# Altium PCB nrf24l01_cell(P40).PcbDoc (part 10 of 11)
Units mm, origin at the board's own origin, x right, y up, seen from the top; angles counter-clockwise.
Board outline 136.2 x 112.2 mm, 2 copper layers (TopLayer, BottomLayer); 520 components, 0 nets, 2804 pads, 1040 vias.
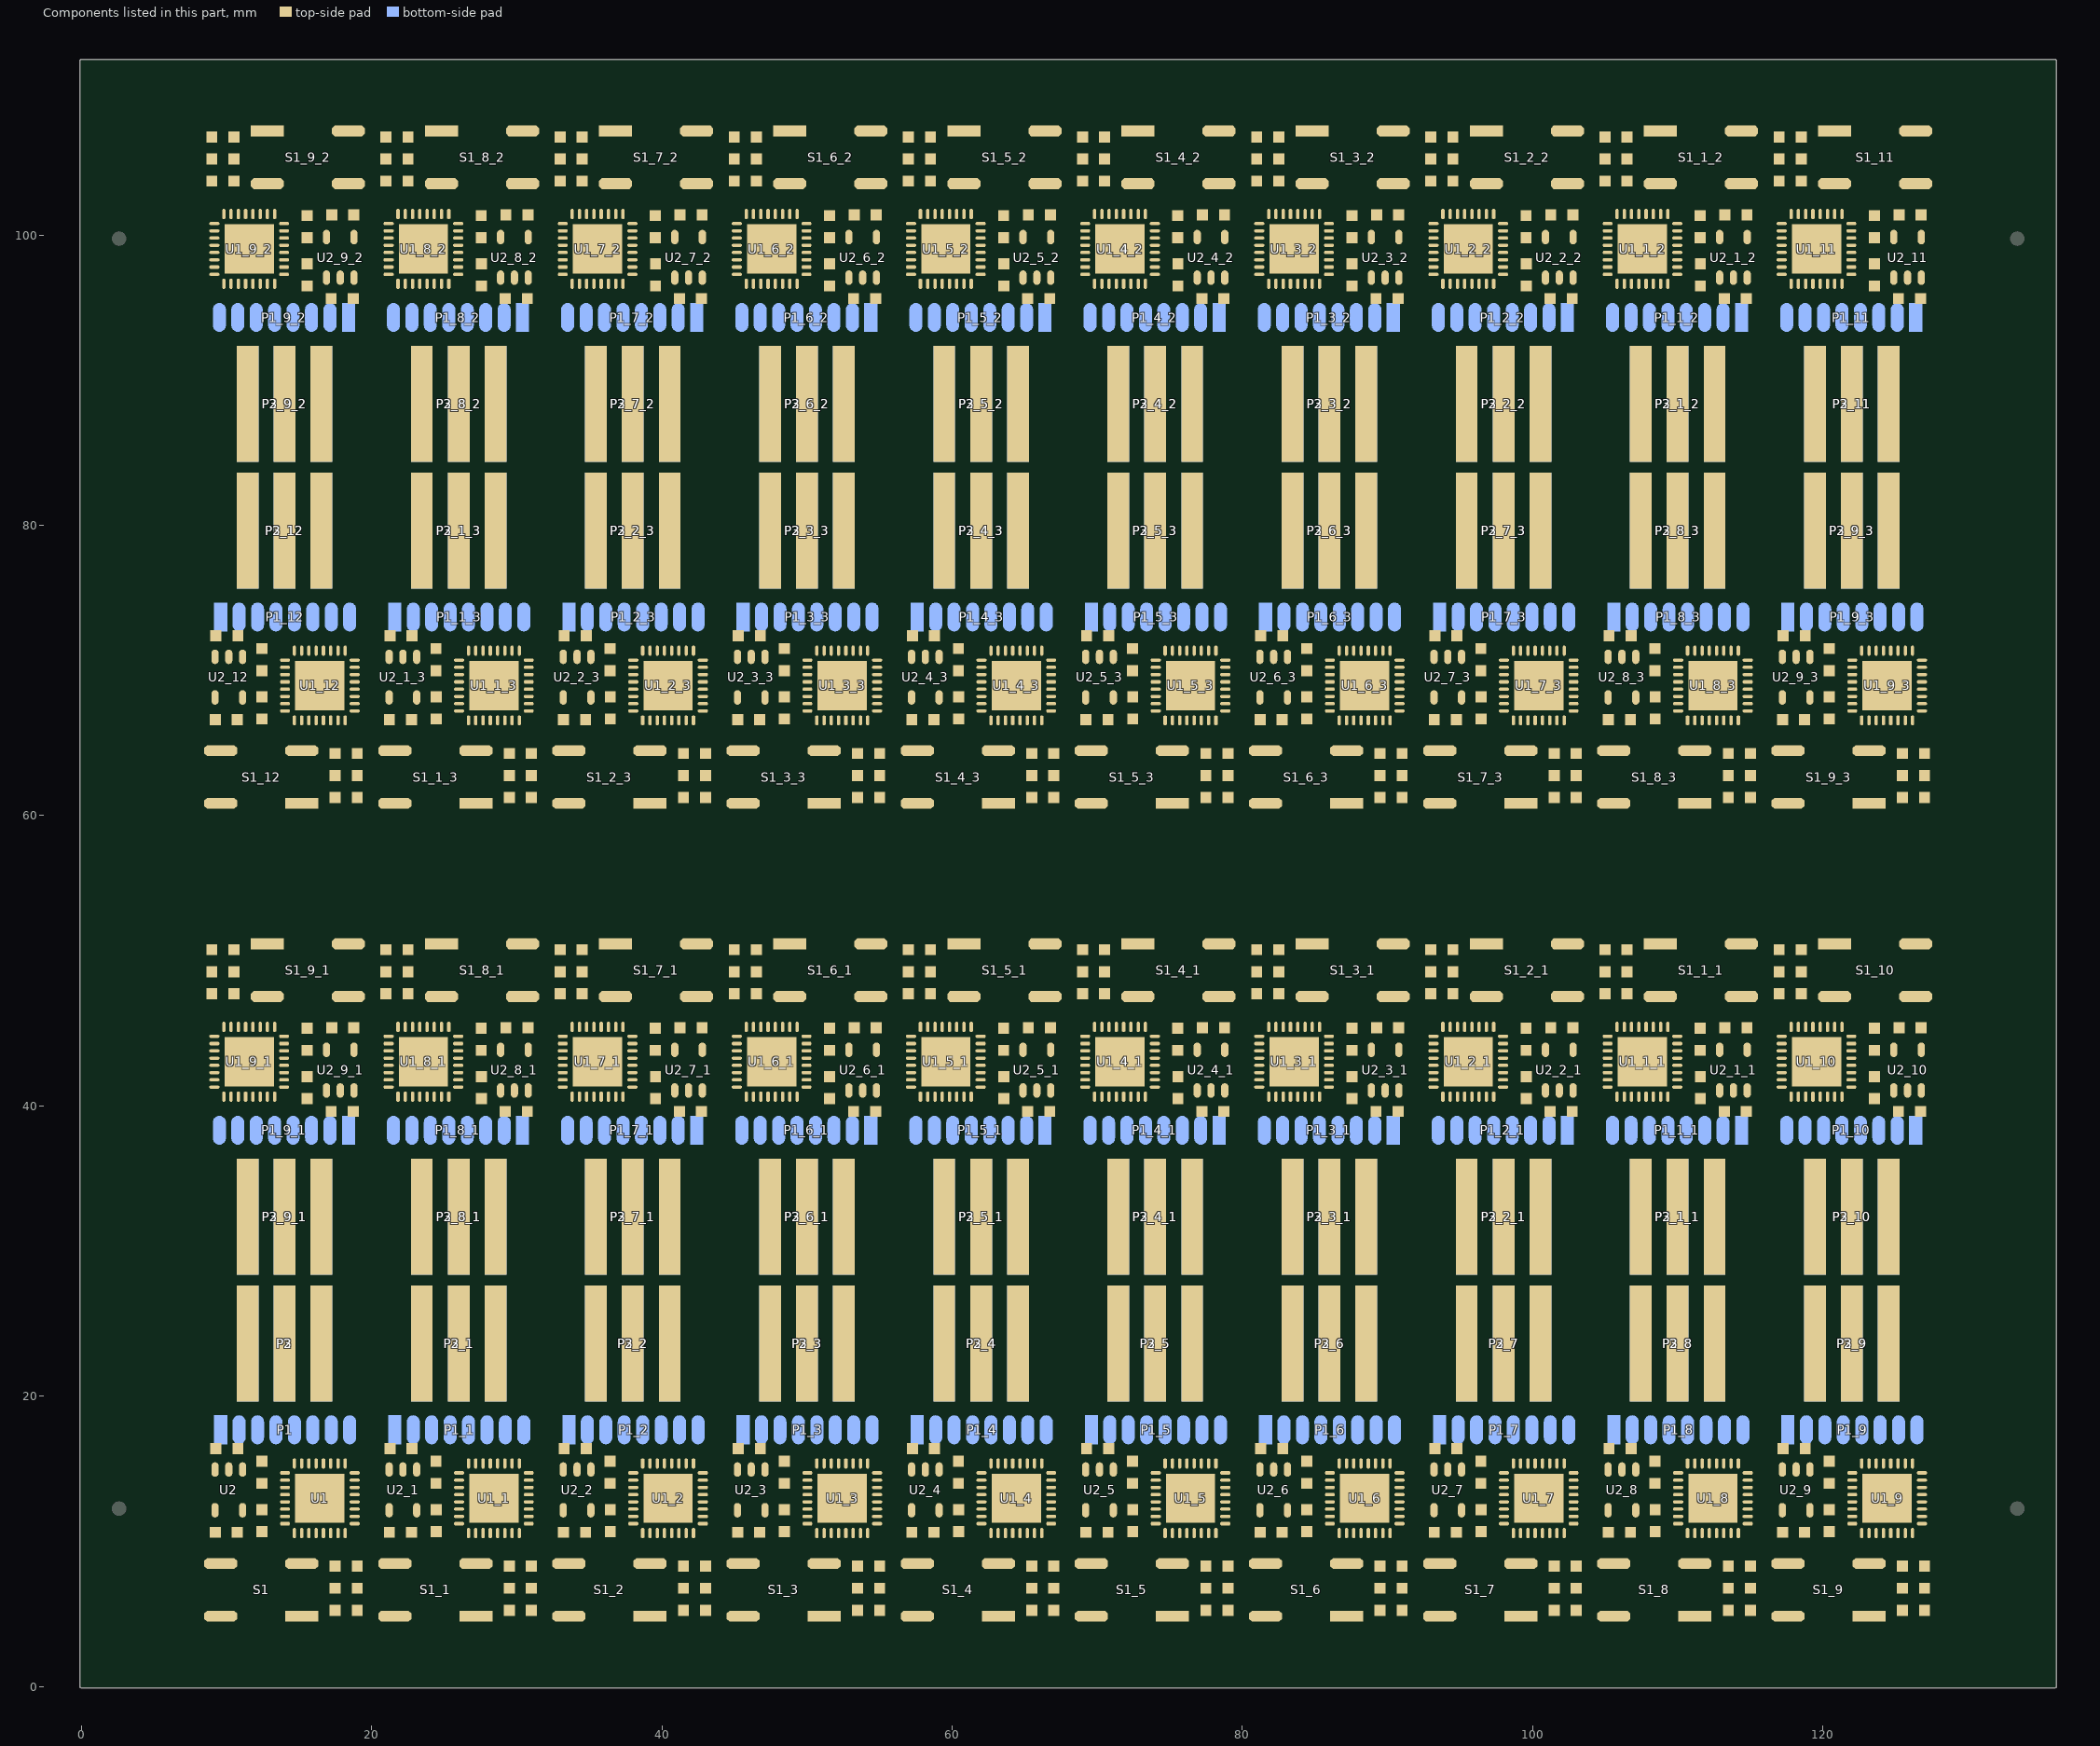
[diagram p10: the components of this part, seen from the top]

## Via types
v1: diameter 0.4, hole 0.2, TopLayer to BottomLayer, tented both sides, 1040 vias

## Nets (pads, with @x,y where several pads share a name; then routed paths per layer and width w, separated by ;. In a path a pad name is that pad's centre, name@x,y a point inside that pad or via, vN(x,y) a via of type N, cw(c..) or ccw(c..) an arc to the next point about the centre after c; other vN are vias at no path point) (continued)
copper on no net: (continued)
  BottomLayer w0.203: v1(102.99,9.79) 99.97,9.79 v1(97.27,12.49) 97.25,12.51 97.25,13.38 ; v1(102.99,65.79) 99.97,65.79 v1(97.27,68.49) 97.25,68.51 97.25,69.38 ; v1@103.24,38.14 ccw(c103.097,38.283) 103.3,38.283 ; v1@103.24,94.14 ccw(c103.097,94.283) 103.3,94.283 ; 103.3,38.332 ccw(c103.572,38.332) v1@103.38,38.14 ; 103.3,94.332 ccw(c103.572,94.332) v1@103.38,94.14 ; v1@103.38,12.28 ccw(c103.212,12.448) 103.45,12.448 ccw(c103.688,12.448) v1@103.52,12.28 ; v1@103.38,17.85 cw(c103.212,17.682) 103.45,17.682 cw(c103.688,17.682) v1@103.52,17.85 ; v1@103.38,68.28 ccw(c103.212,68.448) 103.45,68.448 ccw(c103.688,68.448) v1@103.52,68.28 ; v1@103.38,73.85 cw(c103.212,73.682) 103.45,73.682 cw(c103.688,73.682) v1@103.52,73.85 ; v1(103.45,12.21) v1(103.45,17.92) ; v1(103.45,68.21) v1(103.45,73.92) ; v1@104.48,38.15 ccw(c104.312,38.318) 104.55,38.318 ccw(c104.788,38.318) v1@104.62,38.15 ; v1@104.48,43.72 cw(c104.312,43.552) 104.55,43.552 cw(c104.788,43.552) v1@104.62,43.72 ; v1@104.48,94.15 ccw(c104.312,94.318) 104.55,94.318 ccw(c104.788,94.318) v1@104.62,94.15 ; v1@104.48,99.72 cw(c104.312,99.552) 104.55,99.552 cw(c104.788,99.552) v1@104.62,99.72 ; v1(104.55,38.08) v1(104.55,43.79) ; v1(104.55,94.08) v1(104.55,99.79) ; v1@104.62,17.86 cw(c104.428,17.668) 104.7,17.668 ; v1@104.62,73.86 cw(c104.428,73.668) 104.7,73.668 ; 104.7,17.717 cw(c104.903,17.717) v1@104.76,17.86 ; 104.7,73.717 cw(c104.903,73.717) v1@104.76,73.86 ; v1@104.75,17.93 104.7,17.88 104.7,14.05 105.776,12.974 107.776,12.974 v1(110.03,10.72) ; v1@104.75,73.93 104.7,73.88 104.7,70.05 105.776,68.974 107.776,68.974 v1(110.03,66.72) ; v1(105.01,46.21) 108.03,46.21 v1(110.73,43.51) 110.75,43.49 110.75,42.62 ; v1(105.01,102.21) 108.03,102.21 v1(110.73,99.51) 110.75,99.49 110.75,98.62 ; v1@105.08,46.14 cw(c105.248,45.972) 105.248,46.21 cw(c105.248,46.448) v1@105.08,46.28 ; v1@105.08,102.14 cw(c105.248,101.972) 105.248,102.21 cw(c105.248,102.448) v1@105.08,102.28 ; 105.6,17.68 105.36,17.44 105.36,13.97 105.95,13.38 109.25,13.38 ; 105.6,73.68 105.36,73.44 105.36,69.97 105.95,69.38 109.25,69.38 ; 107.105,19.838 cw(c106.674,19.18) v1@107.46,19.18 ; 107.105,75.838 cw(c106.674,75.18) v1@107.46,75.18 ; 107.216,20.008 cw(c106.92,19.556) 107.46,19.556 cw(c108,19.556) 107.704,20.008 ; 107.216,76.008 cw(c106.92,75.556) 107.46,75.556 cw(c108,75.556) 107.704,76.008 ; v1@107.39,19.21 ccw(c107.222,19.378) 107.46,19.378 ccw(c107.698,19.378) v1@107.53,19.21 ; v1@107.39,75.21 ccw(c107.222,75.378) 107.46,75.378 ccw(c107.698,75.378) v1@107.53,75.21 ; 107.46,23.63 v1@107.46,19.18 ; 107.46,79.63 v1@107.46,75.18 ; 107.815,19.838 ccw(c108.246,19.18) v1@107.46,19.18 ; 107.815,75.838 ccw(c108.246,75.18) v1@107.46,75.18 ; v1@108.79,19.468 ccw(c108.79,19.706) 108.958,19.538 ccw(c109.126,19.37) v1@108.888,19.37 ; v1@108.79,75.468 ccw(c108.79,75.706) 108.958,75.538 ccw(c109.126,75.37) v1@108.888,75.37 ; 109.035,19.615 ccw(c108.269,20.38) 109.352,20.38 ; 109.035,75.615 ccw(c108.269,76.38) 109.352,76.38 ; 109.076,19.656 cw(c109.787,18.944) 109.935,19.94 ; 109.076,75.656 cw(c109.787,74.944) 109.935,75.94 ; v1@109.18,13.87 cw(c109.012,13.702) 109.25,13.702 cw(c109.488,13.702) v1@109.32,13.87 ; v1@109.18,69.87 cw(c109.012,69.702) 109.25,69.702 cw(c109.488,69.702) v1@109.32,69.87 ; 109.25,12.776 ccw(c109.556,12.776) v1@109.34,12.56 ; v1(109.25,13.94) 109.25,13.38 ; 109.25,68.776 ccw(c109.556,68.776) v1@109.34,68.56 ; v1(109.25,69.94) 109.25,69.38 ; v1@109.27,12.392 cw(c109.27,12.154) 109.438,12.322 cw(c109.606,12.49) v1@109.368,12.49 ; v1@109.27,68.392 cw(c109.27,68.154) 109.438,68.322 cw(c109.606,68.49) v1@109.368,68.49 ; 109.361,19.941 cw(c109.861,19.441) 109.965,20.141 ; 109.361,75.941 cw(c109.861,75.441) 109.965,76.141 ; 109.905,19.739 ccw(c109.714,18.446) v1(108.79,19.37) 110,20.58 110,23.63 ; 109.905,75.739 ccw(c109.714,74.446) v1(108.79,75.37) 110,76.58 110,79.63 ; v1@109.932,10.72 ccw(c109.694,10.72) 109.862,10.888 ccw(c110.03,11.056) v1@110.03,10.818 ; v1@109.932,66.72 ccw(c109.694,66.72) 109.862,66.888 ccw(c110.03,67.056) v1@110.03,66.818 ; v1@109.97,45.182 cw(c109.97,44.944) 110.138,45.112 cw(c110.306,45.28) v1@110.068,45.28 ; v1(109.97,45.28) 112.224,43.026 114.224,43.026 115.3,41.95 115.3,38.12 v1@115.25,38.07 ; v1@109.97,101.182 cw(c109.97,100.944) 110.138,101.112 cw(c110.306,101.28) v1@110.068,101.28 ; v1(109.97,101.28) 112.224,99.026 114.224,99.026 115.3,97.95 115.3,94.12 v1@115.25,94.07 ; 110,32.37 110,35.42 v1(111.21,36.63) cw(c110.286,37.554) 110.095,36.261 ; 110,88.37 110,91.42 v1(111.21,92.63) cw(c110.286,93.554) 110.095,92.261 ; 110.035,35.859 ccw(c110.139,36.559) 110.639,36.059 ; 110.035,91.859 ccw(c110.139,92.559) 110.639,92.059 ; 110.065,36.06 ccw(c110.213,37.056) 110.924,36.344 ; 110.065,92.06 ccw(c110.213,93.056) 110.924,92.344 ; v1@110.632,43.51 ccw(c110.394,43.51) 110.562,43.678 ccw(c110.73,43.846) v1@110.73,43.608 ; v1@110.632,99.51 ccw(c110.394,99.51) 110.562,99.678 ccw(c110.73,99.846) v1@110.73,99.608 ; 110.648,35.62 cw(c111.731,35.62) 110.965,36.385 ; 110.648,91.62 cw(c111.731,91.62) 110.965,92.385 ; v1@110.66,43.44 cw(c110.444,43.224) 110.75,43.224 ; v1@110.66,99.44 cw(c110.444,99.224) 110.75,99.224 ; v1@110.68,42.13 ccw(c110.512,42.298) 110.75,42.298 ccw(c110.988,42.298) v1@110.82,42.13 ; v1@110.68,98.13 ccw(c110.512,98.298) 110.75,98.298 ccw(c110.988,98.298) v1@110.82,98.13 ; v1(110.75,42.06) 110.75,42.62 ; v1(110.75,98.06) 110.75,98.62 ; v1@111.112,36.63 cw(c110.874,36.63) 111.042,36.462 cw(c111.21,36.294) v1@111.21,36.532 ; v1@111.112,92.63 cw(c110.874,92.63) 111.042,92.462 cw(c111.21,92.294) v1@111.21,92.532 ; 112.185,36.162 ccw(c111.754,36.82) v1@112.54,36.82 ; 112.185,92.162 ccw(c111.754,92.82) v1@112.54,92.82 ; 112.296,35.992 ccw(c112,36.444) 112.54,36.444 ccw(c113.08,36.444) 112.784,35.992 ; 112.296,91.992 ccw(c112,92.444) 112.54,92.444 ccw(c113.08,92.444) 112.784,91.992 ; v1@112.47,36.79 cw(c112.302,36.622) 112.54,36.622 cw(c112.778,36.622) v1@112.61,36.79 ; v1@112.47,92.79 cw(c112.302,92.622) 112.54,92.622 cw(c112.778,92.622) v1@112.61,92.79 ; 112.54,32.37 v1@112.54,36.82 ; 112.54,88.37 v1@112.54,92.82 ; 112.895,36.162 cw(c113.326,36.82) v1@112.54,36.82 ; 112.895,92.162 cw(c113.326,92.82) v1@112.54,92.82 ; 114.4,38.32 114.64,38.56 114.64,42.03 114.05,42.62 110.75,42.62 ; 114.4,94.32 114.64,94.56 114.64,98.03 114.05,98.62 110.75,98.62 ; v1@114.92,9.72 ccw(c114.752,9.552) 114.752,9.79 ccw(c114.752,10.028) v1@114.92,9.86 ; v1@114.92,65.72 ccw(c114.752,65.552) 114.752,65.79 ccw(c114.752,66.028) v1@114.92,65.86 ; v1(114.99,9.79) 111.97,9.79 v1(109.27,12.49) 109.25,12.51 109.25,13.38 ; v1(114.99,65.79) 111.97,65.79 v1(109.27,68.49) 109.25,68.51 109.25,69.38 ; v1@115.24,38.14 ccw(c115.097,38.283) 115.3,38.283 ; v1@115.24,94.14 ccw(c115.097,94.283) 115.3,94.283 ; 115.3,38.332 ccw(c115.572,38.332) v1@115.38,38.14 ; 115.3,94.332 ccw(c115.572,94.332) v1@115.38,94.14 ; v1@115.38,12.28 ccw(c115.212,12.448) 115.45,12.448 ccw(c115.688,12.448) v1@115.52,12.28 ; v1@115.38,17.85 cw(c115.212,17.682) 115.45,17.682 cw(c115.688,17.682) v1@115.52,17.85 ; v1@115.38,68.28 ccw(c115.212,68.448) 115.45,68.448 ccw(c115.688,68.448) v1@115.52,68.28 ; v1@115.38,73.85 cw(c115.212,73.682) 115.45,73.682 cw(c115.688,73.682) v1@115.52,73.85 ; v1(115.45,12.21) v1(115.45,17.92) ; v1(115.45,68.21) v1(115.45,73.92) ; v1@116.48,38.15 ccw(c116.312,38.318) 116.55,38.318 ccw(c116.788,38.318) v1@116.62,38.15 ; v1@116.48,43.72 cw(c116.312,43.552) 116.55,43.552 cw(c116.788,43.552) v1@116.62,43.72 ; v1@116.48,94.15 ccw(c116.312,94.318) 116.55,94.318 ccw(c116.788,94.318) v1@116.62,94.15 ; v1@116.48,99.72 cw(c116.312,99.552) 116.55,99.552 cw(c116.788,99.552) v1@116.62,99.72 ; v1(116.55,38.08) v1(116.55,43.79) ; v1(116.55,94.08) v1(116.55,99.79) ; v1@116.62,17.86 cw(c116.428,17.668) 116.7,17.668 ; v1@116.62,73.86 cw(c116.428,73.668) 116.7,73.668 ; 116.7,17.717 cw(c116.903,17.717) v1@116.76,17.86 ; 116.7,73.717 cw(c116.903,73.717) v1@116.76,73.86 ; v1@116.75,17.93 116.7,17.88 116.7,14.05 117.776,12.974 119.776,12.974 v1(122.03,10.72) ; v1@116.75,73.93 116.7,73.88 116.7,70.05 117.776,68.974 119.776,68.974 v1(122.03,66.72) ; v1(117.01,46.21) 120.03,46.21 v1(122.73,43.51) 122.75,43.49 122.75,42.62 ; v1(117.01,102.21) 120.03,102.21 v1(122.73,99.51) 122.75,99.49 122.75,98.62 ; v1@117.08,46.14 cw(c117.248,45.972) 117.248,46.21 cw(c117.248,46.448) v1@117.08,46.28 ; v1@117.08,102.14 cw(c117.248,101.972) 117.248,102.21 cw(c117.248,102.448) v1@117.08,102.28 ; 117.6,17.68 117.36,17.44 117.36,13.97 117.95,13.38 121.25,13.38 ; 117.6,73.68 117.36,73.44 117.36,69.97 117.95,69.38 121.25,69.38 ; 119.105,19.838 cw(c118.674,19.18) v1@119.46,19.18 ; 119.105,75.838 cw(c118.674,75.18) v1@119.46,75.18 ; 119.216,20.008 cw(c118.92,19.556) 119.46,19.556 cw(c120,19.556) 119.704,20.008 ; 119.216,76.008 cw(c118.92,75.556) 119.46,75.556 cw(c120,75.556) 119.704,76.008 ; v1@119.39,19.21 ccw(c119.222,19.378) 119.46,19.378 ccw(c119.698,19.378) v1@119.53,19.21 ; v1@119.39,75.21 ccw(c119.222,75.378) 119.46,75.378 ccw(c119.698,75.378) v1@119.53,75.21 ; 119.46,23.63 v1@119.46,19.18 ; 119.46,79.63 v1@119.46,75.18 ; 119.815,19.838 ccw(c120.246,19.18) v1@119.46,19.18 ; 119.815,75.838 ccw(c120.246,75.18) v1@119.46,75.18 ; v1@120.79,19.468 ccw(c120.79,19.706) 120.958,19.538 ccw(c121.126,19.37) v1@120.888,19.37 ; v1@120.79,75.468 ccw(c120.79,75.706) 120.958,75.538 ccw(c121.126,75.37) v1@120.888,75.37 ; 121.035,19.615 ccw(c120.269,20.38) 121.352,20.38 ; 121.035,75.615 ccw(c120.269,76.38) 121.352,76.38 ; 121.076,19.656 cw(c121.787,18.944) 121.935,19.94 ; 121.076,75.656 cw(c121.787,74.944) 121.935,75.94 ; v1@121.18,13.87 cw(c121.012,13.702) 121.25,13.702 cw(c121.488,13.702) v1@121.32,13.87 ; v1@121.18,69.87 cw(c121.012,69.702) 121.25,69.702 cw(c121.488,69.702) v1@121.32,69.87 ; 121.25,12.776 ccw(c121.556,12.776) v1@121.34,12.56 ; v1(121.25,13.94) 121.25,13.38 ; 121.25,68.776 ccw(c121.556,68.776) v1@121.34,68.56 ; v1(121.25,69.94) 121.25,69.38 ; v1@121.27,12.392 cw(c121.27,12.154) 121.438,12.322 cw(c121.606,12.49) v1@121.368,12.49 ; v1@121.27,68.392 cw(c121.27,68.154) 121.438,68.322 cw(c121.606,68.49) v1@121.368,68.49 ; 121.361,19.941 cw(c121.861,19.441) 121.965,20.141 ; 121.361,75.941 cw(c121.861,75.441) 121.965,76.141 ; 121.905,19.739 ccw(c121.714,18.446) v1(120.79,19.37) 122,20.58 122,23.63 ; 121.905,75.739 ccw(c121.714,74.446) v1(120.79,75.37) 122,76.58 122,79.63 ; v1@121.932,10.72 ccw(c121.694,10.72) 121.862,10.888 ccw(c122.03,11.056) v1@122.03,10.818 ; v1@121.932,66.72 ccw(c121.694,66.72) 121.862,66.888 ccw(c122.03,67.056) v1@122.03,66.818 ; v1@121.97,45.182 cw(c121.97,44.944) 122.138,45.112 cw(c122.306,45.28) v1@122.068,45.28 ; v1(121.97,45.28) 124.224,43.026 126.224,43.026 127.3,41.95 127.3,38.12 v1@127.25,38.07 ; v1@121.97,101.182 cw(c121.97,100.944) 122.138,101.112 cw(c122.306,101.28) v1@122.068,101.28 ; v1(121.97,101.28) 124.224,99.026 126.224,99.026 127.3,97.95 127.3,94.12 v1@127.25,94.07 ; 122,32.37 122,35.42 v1(123.21,36.63) cw(c122.286,37.554) 122.095,36.261 ; 122,88.37 122,91.42 v1(123.21,92.63) cw(c122.286,93.554) 122.095,92.261 ; 122.035,35.859 ccw(c122.139,36.559) 122.639,36.059 ; 122.035,91.859 ccw(c122.139,92.559) 122.639,92.059 ; 122.065,36.06 ccw(c122.213,37.056) 122.924,36.344 ; 122.065,92.06 ccw(c122.213,93.056) 122.924,92.344 ; v1@122.632,43.51 ccw(c122.394,43.51) 122.562,43.678 ccw(c122.73,43.846) v1@122.73,43.608 ; v1@122.632,99.51 ccw(c122.394,99.51) 122.562,99.678 ccw(c122.73,99.846) v1@122.73,99.608 ; 122.648,35.62 cw(c123.731,35.62) 122.965,36.385 ; 122.648,91.62 cw(c123.731,91.62) 122.965,92.385 ; v1@122.66,43.44 cw(c122.444,43.224) 122.75,43.224 ; v1@122.66,99.44 cw(c122.444,99.224) 122.75,99.224 ; v1@122.68,42.13 ccw(c122.512,42.298) 122.75,42.298 ccw(c122.988,42.298) v1@122.82,42.13 ; v1@122.68,98.13 ccw(c122.512,98.298) 122.75,98.298 ccw(c122.988,98.298) v1@122.82,98.13 ; v1(122.75,42.06) 122.75,42.62 ; v1(122.75,98.06) 122.75,98.62 ; v1@123.112,36.63 cw(c122.874,36.63) 123.042,36.462 cw(c123.21,36.294) v1@123.21,36.532 ; v1@123.112,92.63 cw(c122.874,92.63) 123.042,92.462 cw(c123.21,92.294) v1@123.21,92.532 ; 124.185,36.162 ccw(c123.754,36.82) v1@124.54,36.82 ; 124.185,92.162 ccw(c123.754,92.82) v1@124.54,92.82 ; 124.296,35.992 ccw(c124,36.444) 124.54,36.444 ccw(c125.08,36.444) 124.784,35.992 ; 124.296,91.992 ccw(c124,92.444) 124.54,92.444 ccw(c125.08,92.444) 124.784,91.992 ; v1@124.47,36.79 cw(c124.302,36.622) 124.54,36.622 cw(c124.778,36.622) v1@124.61,36.79 ; v1@124.47,92.79 cw(c124.302,92.622) 124.54,92.622 cw(c124.778,92.622) v1@124.61,92.79 ; 124.54,32.37 v1@124.54,36.82 ; 124.54,88.37 v1@124.54,92.82 ; 124.895,36.162 cw(c125.326,36.82) v1@124.54,36.82 ; 124.895,92.162 cw(c125.326,92.82) v1@124.54,92.82 ; 126.4,38.32 126.64,38.56 126.64,42.03 126.05,42.62 122.75,42.62 ; 126.4,94.32 126.64,94.56 126.64,98.03 126.05,98.62 122.75,98.62 ; v1@126.92,9.72 ccw(c126.752,9.552) 126.752,9.79 ccw(c126.752,10.028) v1@126.92,9.86 ; v1@126.92,65.72 ccw(c126.752,65.552) 126.752,65.79 ccw(c126.752,66.028) v1@126.92,65.86 ; v1(126.99,9.79) 123.97,9.79 v1(121.27,12.49) 121.25,12.51 121.25,13.38 ; v1(126.99,65.79) 123.97,65.79 v1(121.27,68.49) 121.25,68.51 121.25,69.38 ; v1@127.24,38.14 ccw(c127.097,38.283) 127.3,38.283 ; v1@127.24,94.14 ccw(c127.097,94.283) 127.3,94.283 ; 127.3,38.332 ccw(c127.572,38.332) v1@127.38,38.14 ; 127.3,94.332 ccw(c127.572,94.332) v1@127.38,94.14 ; v1@127.38,12.28 ccw(c127.212,12.448) 127.45,12.448 ccw(c127.688,12.448) v1@127.52,12.28 ; v1@127.38,17.85 cw(c127.212,17.682) 127.45,17.682 cw(c127.688,17.682) v1@127.52,17.85 ; v1@127.38,68.28 ccw(c127.212,68.448) 127.45,68.448 ccw(c127.688,68.448) v1@127.52,68.28 ; v1@127.38,73.85 cw(c127.212,73.682) 127.45,73.682 cw(c127.688,73.682) v1@127.52,73.85 ; v1(127.45,12.21) v1(127.45,17.92) ; v1(127.45,68.21) v1(127.45,73.92)
  BottomLayer w0.254: 9.282,39.098 ccw(c8.73,39.65) 9.51,39.65 ccw(c10.29,39.65) 9.738,39.098 ; 9.282,95.098 ccw(c8.73,95.65) 9.51,95.65 ccw(c10.29,95.65) 9.738,95.098 ; 9.579,37.77 ccw(c10.711,37.77) 9.911,36.969 ; 9.579,93.77 ccw(c10.711,93.77) 9.911,92.969 ; 9.833,37.77 ccw(c11.578,37.77) 10.344,36.536 ; 9.833,93.77 ccw(c11.578,93.77) 10.344,92.536 ; 10.055,36.825 ccw(c11.46,38.23) 11.46,36.243 ; 10.055,92.825 ccw(c11.46,94.23) 11.46,92.243 ; v1(10.16,15.75) 11.27,14.64 v1(12.44,14.64) 13.74,14.64 13.92,14.46 v1(17.91,14.46) 18.28,14.46 18.49,14.67 18.49,17.68 18.49,18.63 16.725,20.395 ; v1(10.16,71.75) 11.27,70.64 v1(12.44,70.64) 13.74,70.64 13.92,70.46 v1(17.91,70.46) 18.28,70.46 18.49,70.67 18.49,73.68 18.49,74.63 16.725,76.395 ; 10.489,36.391 ccw(c11.46,37.363) 11.46,35.989 ; 10.489,92.391 ccw(c11.46,93.363) 11.46,91.989 ; 10.538,36.342 cw(c9.816,35.62) 10.837,35.62 ; 10.538,92.342 cw(c9.816,91.62) 10.837,91.62 ; 10.552,39.098 ccw(c10,39.65) 10.78,39.65 ccw(c11.56,39.65) 11.008,39.098 ; 10.552,95.098 ccw(c10,95.65) 10.78,95.65 ccw(c11.56,95.65) 11.008,95.098 ; 10.78,38.32 10.78,40.32 11.1,40.64 v1(13.95,40.64) ; 10.78,94.32 10.78,96.32 11.1,96.64 v1(13.95,96.64) ; 11.275,35.605 9.51,37.37 9.51,38.32 9.51,41.33 9.72,41.54 v1(10.09,41.54) 14.08,41.54 14.26,41.36 v1(15.56,41.36) 16.73,41.36 v1(17.84,40.25) ; 11.275,91.605 9.51,93.37 9.51,94.32 9.51,97.33 9.72,97.54 v1(10.09,97.54) 14.08,97.54 14.26,97.36 v1(15.56,97.36) 16.73,97.36 v1(17.84,96.25) ; 12.84,41.54 ccw(c12.84,41.75) v1@12.988,41.602 ; 12.84,97.54 ccw(c12.84,97.75) v1@12.988,97.602 ; v1@13.092,41.602 ccw(c13.24,41.75) 13.24,41.54 ; v1@13.092,97.602 ccw(c13.24,97.75) 13.24,97.54 ; v1(14.05,15.36) 16.9,15.36 17.22,15.68 17.22,17.68 ; v1(14.05,71.36) 16.9,71.36 17.22,71.68 17.22,73.68 ; 14.76,14.46 cw(c14.76,14.25) v1@14.908,14.398 ; 14.76,70.46 cw(c14.76,70.25) v1@14.908,70.398 ; v1@15.012,14.398 cw(c15.16,14.25) 15.16,14.46 ; v1@15.012,70.398 cw(c15.16,70.25) 15.16,70.46 ; 16.54,19.757 cw(c16.54,17.77) 17.945,19.175 ; 16.54,20.011 cw(c16.54,18.637) 17.511,19.609 ; 16.54,75.757 cw(c16.54,73.77) 17.945,75.175 ; 16.54,76.011 cw(c16.54,74.637) 17.511,75.609 ; 16.992,16.902 cw(c16.44,16.35) 17.22,16.35 cw(c18,16.35) 17.448,16.902 ; 16.992,72.902 cw(c16.44,72.35) 17.22,72.35 cw(c18,72.35) 17.448,72.902 ; 17.163,20.38 ccw(c18.184,20.38) 17.462,19.658 ; 17.163,76.38 ccw(c18.184,76.38) 17.462,75.658 ; 17.656,19.464 cw(c16.422,18.23) 18.167,18.23 ; 17.656,75.464 cw(c16.422,74.23) 18.167,74.23 ; 18.089,19.031 cw(c17.289,18.23) 18.421,18.23 ; 18.089,75.031 cw(c17.289,74.23) 18.421,74.23 ; 18.262,16.902 cw(c17.71,16.35) 18.49,16.35 cw(c19.27,16.35) 18.718,16.902 ; 18.262,72.902 cw(c17.71,72.35) 18.49,72.35 cw(c19.27,72.35) 18.718,72.902 ; 21.282,39.098 ccw(c20.73,39.65) 21.51,39.65 ccw(c22.29,39.65) 21.738,39.098 ; 21.282,95.098 ccw(c20.73,95.65) 21.51,95.65 ccw(c22.29,95.65) 21.738,95.098 ; 21.579,37.77 ccw(c22.711,37.77) 21.911,36.969 ; 21.579,93.77 ccw(c22.711,93.77) 21.911,92.969 ; 21.833,37.77 ccw(c23.578,37.77) 22.344,36.536 ; 21.833,93.77 ccw(c23.578,93.77) 22.344,92.536 ; 22.055,36.825 ccw(c23.46,38.23) 23.46,36.243 ; 22.055,92.825 ccw(c23.46,94.23) 23.46,92.243 ; v1(22.16,15.75) 23.27,14.64 v1(24.44,14.64) 25.74,14.64 25.92,14.46 v1(29.91,14.46) 30.28,14.46 30.49,14.67 30.49,17.68 30.49,18.63 28.725,20.395 ; v1(22.16,71.75) 23.27,70.64 v1(24.44,70.64) 25.74,70.64 25.92,70.46 v1(29.91,70.46) 30.28,70.46 30.49,70.67 30.49,73.68 30.49,74.63 28.725,76.395 ; 22.489,36.391 ccw(c23.46,37.363) 23.46,35.989 ; 22.489,92.391 ccw(c23.46,93.363) 23.46,91.989 ; 22.538,36.342 cw(c21.816,35.62) 22.837,35.62 ; 22.538,92.342 cw(c21.816,91.62) 22.837,91.62 ; 22.552,39.098 ccw(c22,39.65) 22.78,39.65 ccw(c23.56,39.65) 23.008,39.098 ; 22.552,95.098 ccw(c22,95.65) 22.78,95.65 ccw(c23.56,95.65) 23.008,95.098 ; 22.78,38.32 22.78,40.32 23.1,40.64 v1(25.95,40.64) ; 22.78,94.32 22.78,96.32 23.1,96.64 v1(25.95,96.64) ; 23.275,35.605 21.51,37.37 21.51,38.32 21.51,41.33 21.72,41.54 v1(22.09,41.54) 26.08,41.54 26.26,41.36 v1(27.56,41.36) 28.73,41.36 v1(29.84,40.25) ; 23.275,91.605 21.51,93.37 21.51,94.32 21.51,97.33 21.72,97.54 v1(22.09,97.54) 26.08,97.54 26.26,97.36 v1(27.56,97.36) 28.73,97.36 v1(29.84,96.25) ; 24.84,41.54 ccw(c24.84,41.75) v1@24.988,41.602 ; 24.84,97.54 ccw(c24.84,97.75) v1@24.988,97.602 ; v1@25.092,41.602 ccw(c25.24,41.75) 25.24,41.54 ; v1@25.092,97.602 ccw(c25.24,97.75) 25.24,97.54 ; v1(26.05,15.36) 28.9,15.36 29.22,15.68 29.22,17.68 ; v1(26.05,71.36) 28.9,71.36 29.22,71.68 29.22,73.68 ; 26.76,14.46 cw(c26.76,14.25) v1@26.908,14.398 ; 26.76,70.46 cw(c26.76,70.25) v1@26.908,70.398 ; v1@27.012,14.398 cw(c27.16,14.25) 27.16,14.46 ; v1@27.012,70.398 cw(c27.16,70.25) 27.16,70.46 ; 28.54,19.757 cw(c28.54,17.77) 29.945,19.175 ; 28.54,20.011 cw(c28.54,18.637) 29.511,19.609 ; 28.54,75.757 cw(c28.54,73.77) 29.945,75.175 ; 28.54,76.011 cw(c28.54,74.637) 29.511,75.609 ; 28.992,16.902 cw(c28.44,16.35) 29.22,16.35 cw(c30,16.35) 29.448,16.902 ; 28.992,72.902 cw(c28.44,72.35) 29.22,72.35 cw(c30,72.35) 29.448,72.902 ; 29.163,20.38 ccw(c30.184,20.38) 29.462,19.658 ; 29.163,76.38 ccw(c30.184,76.38) 29.462,75.658 ; 29.656,19.464 cw(c28.422,18.23) 30.167,18.23 ; 29.656,75.464 cw(c28.422,74.23) 30.167,74.23 ; 30.089,19.031 cw(c29.289,18.23) 30.421,18.23 ; 30.089,75.031 cw(c29.289,74.23) 30.421,74.23 ; 30.262,16.902 cw(c29.71,16.35) 30.49,16.35 cw(c31.27,16.35) 30.718,16.902 ; 30.262,72.902 cw(c29.71,72.35) 30.49,72.35 cw(c31.27,72.35) 30.718,72.902 ; 33.282,39.098 ccw(c32.73,39.65) 33.51,39.65 ccw(c34.29,39.65) 33.738,39.098 ; 33.282,95.098 ccw(c32.73,95.65) 33.51,95.65 ccw(c34.29,95.65) 33.738,95.098 ; 33.579,37.77 ccw(c34.711,37.77) 33.911,36.969 ; 33.579,93.77 ccw(c34.711,93.77) 33.911,92.969 ; 33.833,37.77 ccw(c35.578,37.77) 34.344,36.536 ; 33.833,93.77 ccw(c35.578,93.77) 34.344,92.536 ; 34.055,36.825 ccw(c35.46,38.23) 35.46,36.243 ; 34.055,92.825 ccw(c35.46,94.23) 35.46,92.243 ; v1(34.16,15.75) 35.27,14.64 v1(36.44,14.64) 37.74,14.64 37.92,14.46 v1(41.91,14.46) 42.28,14.46 42.49,14.67 42.49,17.68 42.49,18.63 40.725,20.395 ; v1(34.16,71.75) 35.27,70.64 v1(36.44,70.64) 37.74,70.64 37.92,70.46 v1(41.91,70.46) 42.28,70.46 42.49,70.67 42.49,73.68 42.49,74.63 40.725,76.395 ; 34.489,36.391 ccw(c35.46,37.363) 35.46,35.989 ; 34.489,92.391 ccw(c35.46,93.363) 35.46,91.989 ; 34.538,36.342 cw(c33.816,35.62) 34.837,35.62 ; 34.538,92.342 cw(c33.816,91.62) 34.837,91.62 ; 34.552,39.098 ccw(c34,39.65) 34.78,39.65 ccw(c35.56,39.65) 35.008,39.098 ; 34.552,95.098 ccw(c34,95.65) 34.78,95.65 ccw(c35.56,95.65) 35.008,95.098 ; 34.78,38.32 34.78,40.32 35.1,40.64 v1(37.95,40.64) ; 34.78,94.32 34.78,96.32 35.1,96.64 v1(37.95,96.64) ; 35.275,35.605 33.51,37.37 33.51,38.32 33.51,41.33 33.72,41.54 v1(34.09,41.54) 38.08,41.54 38.26,41.36 v1(39.56,41.36) 40.73,41.36 v1(41.84,40.25) ; 35.275,91.605 33.51,93.37 33.51,94.32 33.51,97.33 33.72,97.54 v1(34.09,97.54) 38.08,97.54 38.26,97.36 v1(39.56,97.36) 40.73,97.36 v1(41.84,96.25) ; 36.84,41.54 ccw(c36.84,41.75) v1@36.988,41.602 ; 36.84,97.54 ccw(c36.84,97.75) v1@36.988,97.602 ; v1@37.092,41.602 ccw(c37.24,41.75) 37.24,41.54 ; v1@37.092,97.602 ccw(c37.24,97.75) 37.24,97.54 ; v1(38.05,15.36) 40.9,15.36 41.22,15.68 41.22,17.68 ; v1(38.05,71.36) 40.9,71.36 41.22,71.68 41.22,73.68 ; 38.76,14.46 cw(c38.76,14.25) v1@38.908,14.398 ; 38.76,70.46 cw(c38.76,70.25) v1@38.908,70.398 ; v1@39.012,14.398 cw(c39.16,14.25) 39.16,14.46 ; v1@39.012,70.398 cw(c39.16,70.25) 39.16,70.46 ; 40.54,19.757 cw(c40.54,17.77) 41.945,19.175 ; 40.54,20.011 cw(c40.54,18.637) 41.511,19.609 ; 40.54,75.757 cw(c40.54,73.77) 41.945,75.175 ; 40.54,76.011 cw(c40.54,74.637) 41.511,75.609 ; 40.992,16.902 cw(c40.44,16.35) 41.22,16.35 cw(c42,16.35) 41.448,16.902 ; 40.992,72.902 cw(c40.44,72.35) 41.22,72.35 cw(c42,72.35) 41.448,72.902 ; 41.163,20.38 ccw(c42.184,20.38) 41.462,19.658 ; 41.163,76.38 ccw(c42.184,76.38) 41.462,75.658 ; 41.656,19.464 cw(c40.422,18.23) 42.167,18.23 ; 41.656,75.464 cw(c40.422,74.23) 42.167,74.23 ; 42.089,19.031 cw(c41.289,18.23) 42.421,18.23 ; 42.089,75.031 cw(c41.289,74.23) 42.421,74.23 ; 42.262,16.902 cw(c41.71,16.35) 42.49,16.35 cw(c43.27,16.35) 42.718,16.902 ; 42.262,72.902 cw(c41.71,72.35) 42.49,72.35 cw(c43.27,72.35) 42.718,72.902 ; 45.282,39.098 ccw(c44.73,39.65) 45.51,39.65 ccw(c46.29,39.65) 45.738,39.098 ; 45.282,95.098 ccw(c44.73,95.65) 45.51,95.65 ccw(c46.29,95.65) 45.738,95.098 ; 45.579,37.77 ccw(c46.711,37.77) 45.911,36.969 ; 45.579,93.77 ccw(c46.711,93.77) 45.911,92.969 ; 45.833,37.77 ccw(c47.578,37.77) 46.344,36.536 ; 45.833,93.77 ccw(c47.578,93.77) 46.344,92.536 ; 46.055,36.825 ccw(c47.46,38.23) 47.46,36.243 ; 46.055,92.825 ccw(c47.46,94.23) 47.46,92.243 ; v1(46.16,15.75) 47.27,14.64 v1(48.44,14.64) 49.74,14.64 49.92,14.46 v1(53.91,14.46) 54.28,14.46 54.49,14.67 54.49,17.68 54.49,18.63 52.725,20.395 ; v1(46.16,71.75) 47.27,70.64 v1(48.44,70.64) 49.74,70.64 49.92,70.46 v1(53.91,70.46) 54.28,70.46 54.49,70.67 54.49,73.68 54.49,74.63 52.725,76.395 ; 46.489,36.391 ccw(c47.46,37.363) 47.46,35.989 ; 46.489,92.391 ccw(c47.46,93.363) 47.46,91.989 ; 46.538,36.342 cw(c45.816,35.62) 46.837,35.62 ; 46.538,92.342 cw(c45.816,91.62) 46.837,91.62 ; 46.552,39.098 ccw(c46,39.65) 46.78,39.65 ccw(c47.56,39.65) 47.008,39.098 ; 46.552,95.098 ccw(c46,95.65) 46.78,95.65 ccw(c47.56,95.65) 47.008,95.098 ; 46.78,38.32 46.78,40.32 47.1,40.64 v1(49.95,40.64) ; 46.78,94.32 46.78,96.32 47.1,96.64 v1(49.95,96.64) ; 47.275,35.605 45.51,37.37 45.51,38.32 45.51,41.33 45.72,41.54 v1(46.09,41.54) 50.08,41.54 50.26,41.36 v1(51.56,41.36) 52.73,41.36 v1(53.84,40.25) ; 47.275,91.605 45.51,93.37 45.51,94.32 45.51,97.33 45.72,97.54 v1(46.09,97.54) 50.08,97.54 50.26,97.36 v1(51.56,97.36) 52.73,97.36 v1(53.84,96.25) ; 48.84,41.54 ccw(c48.84,41.75) v1@48.988,41.602 ; 48.84,97.54 ccw(c48.84,97.75) v1@48.988,97.602 ; v1@49.092,41.602 ccw(c49.24,41.75) 49.24,41.54 ; v1@49.092,97.602 ccw(c49.24,97.75) 49.24,97.54 ; v1(50.05,15.36) 52.9,15.36 53.22,15.68 53.22,17.68 ; v1(50.05,71.36) 52.9,71.36 53.22,71.68 53.22,73.68 ; 50.76,14.46 cw(c50.76,14.25) v1@50.908,14.398 ; 50.76,70.46 cw(c50.76,70.25) v1@50.908,70.398 ; v1@51.012,14.398 cw(c51.16,14.25) 51.16,14.46 ; v1@51.012,70.398 cw(c51.16,70.25) 51.16,70.46 ; 52.54,19.757 cw(c52.54,17.77) 53.945,19.175 ; 52.54,20.011 cw(c52.54,18.637) 53.511,19.609 ; 52.54,75.757 cw(c52.54,73.77) 53.945,75.175 ; 52.54,76.011 cw(c52.54,74.637) 53.511,75.609 ; 52.992,16.902 cw(c52.44,16.35) 53.22,16.35 cw(c54,16.35) 53.448,16.902 ; 52.992,72.902 cw(c52.44,72.35) 53.22,72.35 cw(c54,72.35) 53.448,72.902 ; 53.163,20.38 ccw(c54.184,20.38) 53.462,19.658 ; 53.163,76.38 ccw(c54.184,76.38) 53.462,75.658 ; 53.656,19.464 cw(c52.422,18.23) 54.167,18.23 ; 53.656,75.464 cw(c52.422,74.23) 54.167,74.23 ; 54.089,19.031 cw(c53.289,18.23) 54.421,18.23 ; 54.089,75.031 cw(c53.289,74.23) 54.421,74.23 ; 54.262,16.902 cw(c53.71,16.35) 54.49,16.35 cw(c55.27,16.35) 54.718,16.902 ; 54.262,72.902 cw(c53.71,72.35) 54.49,72.35 cw(c55.27,72.35) 54.718,72.902 ; 57.282,39.098 ccw(c56.73,39.65) 57.51,39.65 ccw(c58.29,39.65) 57.738,39.098 ; 57.282,95.098 ccw(c56.73,95.65) 57.51,95.65 ccw(c58.29,95.65) 57.738,95.098 ; 57.579,37.77 ccw(c58.711,37.77) 57.911,36.969 ; 57.579,93.77 ccw(c58.711,93.77) 57.911,92.969 ; 57.833,37.77 ccw(c59.578,37.77) 58.344,36.536 ; 57.833,93.77 ccw(c59.578,93.77) 58.344,92.536 ; 58.055,36.825 ccw(c59.46,38.23) 59.46,36.243 ; 58.055,92.825 ccw(c59.46,94.23) 59.46,92.243 ; v1(58.16,15.75) 59.27,14.64 v1(60.44,14.64) 61.74,14.64 61.92,14.46 v1(65.91,14.46) 66.28,14.46 66.49,14.67 66.49,17.68 66.49,18.63 64.725,20.395 ; v1(58.16,71.75) 59.27,70.64 v1(60.44,70.64) 61.74,70.64 61.92,70.46 v1(65.91,70.46) 66.28,70.46 66.49,70.67 66.49,73.68 66.49,74.63 64.725,76.395 ; 58.489,36.391 ccw(c59.46,37.363) 59.46,35.989 ; 58.489,92.391 ccw(c59.46,93.363) 59.46,91.989 ; 58.538,36.342 cw(c57.816,35.62) 58.837,35.62 ; 58.538,92.342 cw(c57.816,91.62) 58.837,91.62 ; 58.552,39.098 ccw(c58,39.65) 58.78,39.65 ccw(c59.56,39.65) 59.008,39.098 ; 58.552,95.098 ccw(c58,95.65) 58.78,95.65 ccw(c59.56,95.65) 59.008,95.098 ; 58.78,94.32 58.78,96.32 59.1,96.64 v1(61.95,96.64) ; 58.78,38.32 58.78,40.32 59.1,40.64 v1(61.95,40.64) ; 59.275,35.605 57.51,37.37 57.51,38.32 57.51,41.33 57.72,41.54 v1(58.09,41.54) 62.08,41.54 62.26,41.36 v1(63.56,41.36) 64.73,41.36 v1(65.84,40.25) ; 59.275,91.605 57.51,93.37 57.51,94.32 57.51,97.33 57.72,97.54 v1(58.09,97.54) 62.08,97.54 62.26,97.36 v1(63.56,97.36) 64.73,97.36 v1(65.84,96.25) ; 60.84,41.54 ccw(c60.84,41.75) v1@60.988,41.602 ; 60.84,97.54 ccw(c60.84,97.75) v1@60.988,97.602 ; v1@61.092,41.602 ccw(c61.24,41.75) 61.24,41.54 ; v1@61.092,97.602 ccw(c61.24,97.75) 61.24,97.54 ; v1(62.05,15.36) 64.9,15.36 65.22,15.68 65.22,17.68 ; v1(62.05,71.36) 64.9,71.36 65.22,71.68 65.22,73.68 ; 62.76,14.46 cw(c62.76,14.25) v1@62.908,14.398 ; 62.76,70.46 cw(c62.76,70.25) v1@62.908,70.398 ; v1@63.012,14.398 cw(c63.16,14.25) 63.16,14.46 ; v1@63.012,70.398 cw(c63.16,70.25) 63.16,70.46 ; 64.54,19.757 cw(c64.54,17.77) 65.945,19.175 ; 64.54,20.011 cw(c64.54,18.637) 65.511,19.609 ; 64.54,75.757 cw(c64.54,73.77) 65.945,75.175 ; 64.54,76.011 cw(c64.54,74.637) 65.511,75.609 ; 64.992,16.902 cw(c64.44,16.35) 65.22,16.35 cw(c66,16.35) 65.448,16.902 ; 64.992,72.902 cw(c64.44,72.35) 65.22,72.35 cw(c66,72.35) 65.448,72.902 ; 65.163,20.38 ccw(c66.184,20.38) 65.462,19.658 ; 65.163,76.38 ccw(c66.184,76.38) 65.462,75.658 ; 65.656,19.464 cw(c64.422,18.23) 66.167,18.23 ; 65.656,75.464 cw(c64.422,74.23) 66.167,74.23 ; 66.089,19.031 cw(c65.289,18.23) 66.421,18.23 ; 66.089,75.031 cw(c65.289,74.23) 66.421,74.23 ; 66.262,16.902 cw(c65.71,16.35) 66.49,16.35 cw(c67.27,16.35) 66.718,16.902 ; 66.262,72.902 cw(c65.71,72.35) 66.49,72.35 cw(c67.27,72.35) 66.718,72.902 ; 69.282,39.098 ccw(c68.73,39.65) 69.51,39.65 ccw(c70.29,39.65) 69.738,39.098 ; 69.282,95.098 ccw(c68.73,95.65) 69.51,95.65 ccw(c70.29,95.65) 69.738,95.098 ; 69.579,37.77 ccw(c70.711,37.77) 69.911,36.969 ; 69.579,93.77 ccw(c70.711,93.77) 69.911,92.969 ; 69.833,37.77 ccw(c71.578,37.77) 70.344,36.536 ; 69.833,93.77 ccw(c71.578,93.77) 70.344,92.536 ; 70.055,36.825 ccw(c71.46,38.23) 71.46,36.243 ; 70.055,92.825 ccw(c71.46,94.23) 71.46,92.243 ; v1(70.16,15.75) 71.27,14.64 v1(72.44,14.64) 73.74,14.64 73.92,14.46 v1(77.91,14.46) 78.28,14.46 78.49,14.67 78.49,17.68 78.49,18.63 76.725,20.395 ; v1(70.16,71.75) 71.27,70.64 v1(72.44,70.64) 73.74,70.64 73.92,70.46 v1(77.91,70.46) 78.28,70.46 78.49,70.67 78.49,73.68 78.49,74.63 76.725,76.395 ; 70.489,36.391 ccw(c71.46,37.363) 71.46,35.989 ; 70.489,92.391 ccw(c71.46,93.363) 71.46,91.989 ; 70.538,36.342 cw(c69.816,35.62) 70.837,35.62 ; 70.538,92.342 cw(c69.816,91.62) 70.837,91.62 ; 70.552,39.098 ccw(c70,39.65) 70.78,39.65 ccw(c71.56,39.65) 71.008,39.098 ; 70.552,95.098 ccw(c70,95.65) 70.78,95.65 ccw(c71.56,95.65) 71.008,95.098 ; 70.78,38.32 70.78,40.32 71.1,40.64 v1(73.95,40.64) ; 70.78,94.32 70.78,96.32 71.1,96.64 v1(73.95,96.64) ; 71.275,35.605 69.51,37.37 69.51,38.32 69.51,41.33 69.72,41.54 v1(70.09,41.54) 74.08,41.54 74.26,41.36 v1(75.56,41.36) 76.73,41.36 v1(77.84,40.25) ; 71.275,91.605 69.51,93.37 69.51,94.32 69.51,97.33 69.72,97.54 v1(70.09,97.54) 74.08,97.54 74.26,97.36 v1(75.56,97.36) 76.73,97.36 v1(77.84,96.25) ; 72.84,41.54 ccw(c72.84,41.75) v1@72.988,41.602 ; 72.84,97.54 ccw(c72.84,97.75) v1@72.988,97.602 ; v1@73.092,41.602 ccw(c73.24,41.75) 73.24,41.54 ; v1@73.092,97.602 ccw(c73.24,97.75) 73.24,97.54 ; v1(74.05,15.36) 76.9,15.36 77.22,15.68 77.22,17.68 ; v1(74.05,71.36) 76.9,71.36 77.22,71.68 77.22,73.68 ; 74.76,14.46 cw(c74.76,14.25) v1@74.908,14.398 ; 74.76,70.46 cw(c74.76,70.25) v1@74.908,70.398 ; v1@75.012,14.398 cw(c75.16,14.25) 75.16,14.46 ; v1@75.012,70.398 cw(c75.16,70.25) 75.16,70.46 ; 76.54,19.757 cw(c76.54,17.77) 77.945,19.175 ; 76.54,20.011 cw(c76.54,18.637) 77.511,19.609 ; 76.54,75.757 cw(c76.54,73.77) 77.945,75.175 ; 76.54,76.011 cw(c76.54,74.637) 77.511,75.609 ; 76.992,16.902 cw(c76.44,16.35) 77.22,16.35 cw(c78,16.35) 77.448,16.902 ; 76.992,72.902 cw(c76.44,72.35) 77.22,72.35 cw(c78,72.35) 77.448,72.902 ; 77.163,20.38 ccw(c78.184,20.38) 77.462,19.658 ; 77.163,76.38 ccw(c78.184,76.38) 77.462,75.658 ; 77.656,19.464 cw(c76.422,18.23) 78.167,18.23 ; 77.656,75.464 cw(c76.422,74.23) 78.167,74.23 ; 78.089,19.031 cw(c77.289,18.23) 78.421,18.23 ; 78.089,75.031 cw(c77.289,74.23) 78.421,74.23 ; 78.262,16.902 cw(c77.71,16.35) 78.49,16.35 cw(c79.27,16.35) 78.718,16.902 ; 78.262,72.902 cw(c77.71,72.35) 78.49,72.35 cw(c79.27,72.35) 78.718,72.902 ; 81.282,39.098 ccw(c80.73,39.65) 81.51,39.65 ccw(c82.29,39.65) 81.738,39.098 ; 81.282,95.098 ccw(c80.73,95.65) 81.51,95.65 ccw(c82.29,95.65) 81.738,95.098 ; 81.579,37.77 ccw(c82.711,37.77) 81.911,36.969 ; 81.579,93.77 ccw(c82.711,93.77) 81.911,92.969 ; 81.833,37.77 ccw(c83.578,37.77) 82.344,36.536 ; 81.833,93.77 ccw(c83.578,93.77) 82.344,92.536 ; 82.055,36.825 ccw(c83.46,38.23) 83.46,36.243 ; 82.055,92.825 ccw(c83.46,94.23) 83.46,92.243 ; v1(82.16,15.75) 83.27,14.64 v1(84.44,14.64) 85.74,14.64 85.92,14.46 v1(89.91,14.46) 90.28,14.46 90.49,14.67 90.49,17.68 90.49,18.63 88.725,20.395 ; v1(82.16,71.75) 83.27,70.64 v1(84.44,70.64) 85.74,70.64 85.92,70.46 v1(89.91,70.46) 90.28,70.46 90.49,70.67 90.49,73.68 90.49,74.63 88.725,76.395 ; 82.489,36.391 ccw(c83.46,37.363) 83.46,35.989 ; 82.489,92.391 ccw(c83.46,93.363) 83.46,91.989 ; 82.538,36.342 cw(c81.816,35.62) 82.837,35.62 ; 82.538,92.342 cw(c81.816,91.62) 82.837,91.62 ; 82.552,39.098 ccw(c82,39.65) 82.78,39.65 ccw(c83.56,39.65) 83.008,39.098 ; 82.552,95.098 ccw(c82,95.65) 82.78,95.65 ccw(c83.56,95.65) 83.008,95.098 ; 82.78,38.32 82.78,40.32 83.1,40.64 v1(85.95,40.64) ; 82.78,94.32 82.78,96.32 83.1,96.64 v1(85.95,96.64) ; 83.275,35.605 81.51,37.37 81.51,38.32 81.51,41.33 81.72,41.54 v1(82.09,41.54) 86.08,41.54 86.26,41.36 v1(87.56,41.36) 88.73,41.36 v1(89.84,40.25) ; 83.275,91.605 81.51,93.37 81.51,94.32 81.51,97.33 81.72,97.54 v1(82.09,97.54) 86.08,97.54 86.26,97.36 v1(87.56,97.36) 88.73,97.36 v1(89.84,96.25) ; 84.84,41.54 ccw(c84.84,41.75) v1@84.988,41.602 ; 84.84,97.54 ccw(c84.84,97.75) v1@84.988,97.602 ; v1@85.092,41.602 ccw(c85.24,41.75) 85.24,41.54 ; v1@85.092,97.602 ccw(c85.24,97.75) 85.24,97.54 ; v1(86.05,15.36) 88.9,15.36 89.22,15.68 89.22,17.68 ; v1(86.05,71.36) 88.9,71.36 89.22,71.68 89.22,73.68 ; 86.76,14.46 cw(c86.76,14.25) v1@86.908,14.398 ; 86.76,70.46 cw(c86.76,70.25) v1@86.908,70.398 ; v1@87.012,14.398 cw(c87.16,14.25) 87.16,14.46 ; v1@87.012,70.398 cw(c87.16,70.25) 87.16,70.46 ; 88.54,19.757 cw(c88.54,17.77) 89.945,19.175 ; 88.54,20.011 cw(c88.54,18.637) 89.511,19.609 ; 88.54,75.757 cw(c88.54,73.77) 89.945,75.175 ; 88.54,76.011 cw(c88.54,74.637) 89.511,75.609 ; 88.992,16.902 cw(c88.44,16.35) 89.22,16.35 cw(c90,16.35) 89.448,16.902 ; 88.992,72.902 cw(c88.44,72.35) 89.22,72.35 cw(c90,72.35) 89.448,72.902 ; 89.163,20.38 ccw(c90.184,20.38) 89.462,19.658 ; 89.163,76.38 ccw(c90.184,76.38) 89.462,75.658 ; 89.656,19.464 cw(c88.422,18.23) 90.167,18.23 ; 89.656,75.464 cw(c88.422,74.23) 90.167,74.23 ; 90.089,19.031 cw(c89.289,18.23) 90.421,18.23 ; 90.089,75.031 cw(c89.289,74.23) 90.421,74.23 ; 90.262,16.902 cw(c89.71,16.35) 90.49,16.35 cw(c91.27,16.35) 90.718,16.902 ; 90.262,72.902 cw(c89.71,72.35) 90.49,72.35 cw(c91.27,72.35) 90.718,72.902 ; 93.282,39.098 ccw(c92.73,39.65) 93.51,39.65 ccw(c94.29,39.65) 93.738,39.098 ; 93.282,95.098 ccw(c92.73,95.65) 93.51,95.65 ccw(c94.29,95.65) 93.738,95.098 ; 93.579,37.77 ccw(c94.711,37.77) 93.911,36.969 ; 93.579,93.77 ccw(c94.711,93.77) 93.911,92.969 ; 93.833,37.77 ccw(c95.578,37.77) 94.344,36.536 ; 93.833,93.77 ccw(c95.578,93.77) 94.344,92.536 ; 94.055,36.825 ccw(c95.46,38.23) 95.46,36.243 ; 94.055,92.825 ccw(c95.46,94.23) 95.46,92.243 ; v1(94.16,15.75) 95.27,14.64 v1(96.44,14.64) 97.74,14.64 97.92,14.46 v1(101.91,14.46) 102.28,14.46 102.49,14.67 102.49,17.68 102.49,18.63 100.725,20.395 ; v1(94.16,71.75) 95.27,70.64 v1(96.44,70.64) 97.74,70.64 97.92,70.46 v1(101.91,70.46) 102.28,70.46 102.49,70.67 102.49,73.68 102.49,74.63 100.725,76.395 ; 94.489,36.391 ccw(c95.46,37.363) 95.46,35.989 ; 94.489,92.391 ccw(c95.46,93.363) 95.46,91.989 ; 94.538,36.342 cw(c93.816,35.62) 94.837,35.62 ; 94.538,92.342 cw(c93.816,91.62) 94.837,91.62 ; 94.552,39.098 ccw(c94,39.65) 94.78,39.65 ccw(c95.56,39.65) 95.008,39.098 ; 94.552,95.098 ccw(c94,95.65) 94.78,95.65 ccw(c95.56,95.65) 95.008,95.098 ; 94.78,38.32 94.78,40.32 95.1,40.64 v1(97.95,40.64) ; 94.78,94.32 94.78,96.32 95.1,96.64 v1(97.95,96.64) ; 95.275,35.605 93.51,37.37 93.51,38.32 93.51,41.33 93.72,41.54 v1(94.09,41.54) 98.08,41.54 98.26,41.36 v1(99.56,41.36) 100.73,41.36 v1(101.84,40.25) ; 95.275,91.605 93.51,93.37 93.51,94.32 93.51,97.33 93.72,97.54 v1(94.09,97.54) 98.08,97.54 98.26,97.36 v1(99.56,97.36) 100.73,97.36 v1(101.84,96.25) ; 96.84,41.54 ccw(c96.84,41.75) v1@96.988,41.602 ; 96.84,97.54 ccw(c96.84,97.75) v1@96.988,97.602 ; v1@97.092,41.602 ccw(c97.24,41.75) 97.24,41.54 ; v1@97.092,97.602 ccw(c97.24,97.75) 97.24,97.54 ; v1(98.05,15.36) 100.9,15.36 101.22,15.68 101.22,17.68 ; v1(98.05,71.36) 100.9,71.36 101.22,71.68 101.22,73.68 ; 98.76,14.46 cw(c98.76,14.25) v1@98.908,14.398 ; 98.76,70.46 cw(c98.76,70.25) v1@98.908,70.398 ; v1@99.012,14.398 cw(c99.16,14.25) 99.16,14.46 ; v1@99.012,70.398 cw(c99.16,70.25) 99.16,70.46 ; 100.54,19.757 cw(c100.54,17.77) 101.945,19.175 ; 100.54,20.011 cw(c100.54,18.637) 101.511,19.609 ; 100.54,75.757 cw(c100.54,73.77) 101.945,75.175 ; 100.54,76.011 cw(c100.54,74.637) 101.511,75.609 ; 100.992,16.902 cw(c100.44,16.35) 101.22,16.35 cw(c102,16.35) 101.448,16.902 ; 100.992,72.902 cw(c100.44,72.35) 101.22,72.35 cw(c102,72.35) 101.448,72.902 ; 101.163,20.38 ccw(c102.184,20.38) 101.462,19.658 ; 101.163,76.38 ccw(c102.184,76.38) 101.462,75.658 ; 101.656,19.464 cw(c100.422,18.23) 102.167,18.23 ; 101.656,75.464 cw(c100.422,74.23) 102.167,74.23 ; 102.089,19.031 cw(c101.289,18.23) 102.421,18.23 ; 102.089,75.031 cw(c101.289,74.23) 102.421,74.23 ; 102.262,16.902 cw(c101.71,16.35) 102.49,16.35 cw(c103.27,16.35) 102.718,16.902 ; 102.262,72.902 cw(c101.71,72.35) 102.49,72.35 cw(c103.27,72.35) 102.718,72.902 ; 105.282,39.098 ccw(c104.73,39.65) 105.51,39.65 ccw(c106.29,39.65) 105.738,39.098 ; 105.282,95.098 ccw(c104.73,95.65) 105.51,95.65 ccw(c106.29,95.65) 105.738,95.098 ; 105.579,37.77 ccw(c106.711,37.77) 105.911,36.969 ; 105.579,93.77 ccw(c106.711,93.77) 105.911,92.969 ; 105.833,37.77 ccw(c107.578,37.77) 106.344,36.536 ; 105.833,93.77 ccw(c107.578,93.77) 106.344,92.536 ; 106.055,36.825 ccw(c107.46,38.23) 107.46,36.243 ; 106.055,92.825 ccw(c107.46,94.23) 107.46,92.243 ; v1(106.16,15.75) 107.27,14.64 v1(108.44,14.64) 109.74,14.64 109.92,14.46 v1(113.91,14.46) 114.28,14.46 114.49,14.67 114.49,17.68 114.49,18.63 112.725,20.395 ; v1(106.16,71.75) 107.27,70.64 v1(108.44,70.64) 109.74,70.64 109.92,70.46 v1(113.91,70.46) 114.28,70.46 114.49,70.67 114.49,73.68 114.49,74.63 112.725,76.395 ; 106.489,36.391 ccw(c107.46,37.363) 107.46,35.989 ; 106.489,92.391 ccw(c107.46,93.363) 107.46,91.989 ; 106.538,36.342 cw(c105.816,35.62) 106.837,35.62 ; 106.538,92.342 cw(c105.816,91.62) 106.837,91.62 ; 106.552,39.098 ccw(c106,39.65) 106.78,39.65 ccw(c107.56,39.65) 107.008,39.098 ; 106.552,95.098 ccw(c106,95.65) 106.78,95.65 ccw(c107.56,95.65) 107.008,95.098 ; 106.78,38.32 106.78,40.32 107.1,40.64 v1(109.95,40.64) ; 106.78,94.32 106.78,96.32 107.1,96.64 v1(109.95,96.64) ; 107.275,35.605 105.51,37.37 105.51,38.32 105.51,41.33 105.72,41.54 v1(106.09,41.54) 110.08,41.54 110.26,41.36 v1(111.56,41.36) 112.73,41.36 v1(113.84,40.25) ; 107.275,91.605 105.51,93.37 105.51,94.32 105.51,97.33 105.72,97.54 v1(106.09,97.54) 110.08,97.54 110.26,97.36 v1(111.56,97.36) 112.73,97.36 v1(113.84,96.25) ; 108.84,41.54 ccw(c108.84,41.75) v1@108.988,41.602 ; 108.84,97.54 ccw(c108.84,97.75) v1@108.988,97.602 ; v1@109.092,41.602 ccw(c109.24,41.75) 109.24,41.54 ; v1@109.092,97.602 ccw(c109.24,97.75) 109.24,97.54 ; v1(110.05,15.36) 112.9,15.36 113.22,15.68 113.22,17.68 ; v1(110.05,71.36) 112.9,71.36 113.22,71.68 113.22,73.68 ; 110.76,14.46 cw(c110.76,14.25) v1@110.908,14.398 ; 110.76,70.46 cw(c110.76,70.25) v1@110.908,70.398 ; v1@111.012,14.398 cw(c111.16,14.25) 111.16,14.46 ; v1@111.012,70.398 cw(c111.16,70.25) 111.16,70.46 ; 112.54,19.757 cw(c112.54,17.77) 113.945,19.175 ; 112.54,20.011 cw(c112.54,18.637) 113.511,19.609 ; 112.54,75.757 cw(c112.54,73.77) 113.945,75.175 ; 112.54,76.011 cw(c112.54,74.637) 113.511,75.609 ; 112.992,16.902 cw(c112.44,16.35) 113.22,16.35 cw(c114,16.35) 113.448,16.902 ; 112.992,72.902 cw(c112.44,72.35) 113.22,72.35 cw(c114,72.35) 113.448,72.902 ; 113.163,20.38 ccw(c114.184,20.38) 113.462,19.658 ; 113.163,76.38 ccw(c114.184,76.38) 113.462,75.658 ; 113.656,19.464 cw(c112.422,18.23) 114.167,18.23 ; 113.656,75.464 cw(c112.422,74.23) 114.167,74.23 ; 114.089,19.031 cw(c113.289,18.23) 114.421,18.23 ; 114.089,75.031 cw(c113.289,74.23) 114.421,74.23 ; 114.262,16.902 cw(c113.71,16.35) 114.49,16.35 cw(c115.27,16.35) 114.718,16.902 ; 114.262,72.902 cw(c113.71,72.35) 114.49,72.35 cw(c115.27,72.35) 114.718,72.902 ; 117.282,39.098 ccw(c116.73,39.65) 117.51,39.65 ccw(c118.29,39.65) 117.738,39.098 ; 117.282,95.098 ccw(c116.73,95.65) 117.51,95.65 ccw(c118.29,95.65) 117.738,95.098 ; 117.579,37.77 ccw(c118.711,37.77) 117.911,36.969 ; 117.579,93.77 ccw(c118.711,93.77) 117.911,92.969 ; 117.833,37.77 ccw(c119.578,37.77) 118.344,36.536 ; 117.833,93.77 ccw(c119.578,93.77) 118.344,92.536 ; 118.055,36.825 ccw(c119.46,38.23) 119.46,36.243 ; 118.055,92.825 ccw(c119.46,94.23) 119.46,92.243 ; v1(118.16,15.75) 119.27,14.64 v1(120.44,14.64) 121.74,14.64 121.92,14.46 v1(125.91,14.46) 126.28,14.46 126.49,14.67 126.49,17.68 126.49,18.63 124.725,20.395 ; v1(118.16,71.75) 119.27,70.64 v1(120.44,70.64) 121.74,70.64 121.92,70.46 v1(125.91,70.46) 126.28,70.46 126.49,70.67 126.49,73.68 126.49,74.63 124.725,76.395 ; 118.489,36.391 ccw(c119.46,37.363) 119.46,35.989 ; 118.489,92.391 ccw(c119.46,93.363) 119.46,91.989 ; 118.538,36.342 cw(c117.816,35.62) 118.837,35.62 ; 118.538,92.342 cw(c117.816,91.62) 118.837,91.62 ; 118.552,39.098 ccw(c118,39.65) 118.78,39.65 ccw(c119.56,39.65) 119.008,39.098 ; 118.552,95.098 ccw(c118,95.65) 118.78,95.65 ccw(c119.56,95.65) 119.008,95.098 ; 118.78,38.32 118.78,40.32 119.1,40.64 v1(121.95,40.64) ; 118.78,94.32 118.78,96.32 119.1,96.64 v1(121.95,96.64) ; 119.275,35.605 117.51,37.37 117.51,38.32 117.51,41.33 117.72,41.54 v1(118.09,41.54) 122.08,41.54 122.26,41.36 v1(123.56,41.36) 124.73,41.36 v1(125.84,40.25) ; 119.275,91.605 117.51,93.37 117.51,94.32 117.51,97.33 117.72,97.54 v1(118.09,97.54) 122.08,97.54 122.26,97.36 v1(123.56,97.36) 124.73,97.36 v1(125.84,96.25) ; 120.84,41.54 ccw(c120.84,41.75) v1@120.988,41.602 ; 120.84,97.54 ccw(c120.84,97.75) v1@120.988,97.602 ; v1@121.092,41.602 ccw(c121.24,41.75) 121.24,41.54 ; v1@121.092,97.602 ccw(c121.24,97.75) 121.24,97.54 ; v1(122.05,15.36) 124.9,15.36 125.22,15.68 125.22,17.68 ; v1(122.05,71.36) 124.9,71.36 125.22,71.68 125.22,73.68 ; 122.76,14.46 cw(c122.76,14.25) v1@122.908,14.398 ; 122.76,70.46 cw(c122.76,70.25) v1@122.908,70.398 ; v1@123.012,14.398 cw(c123.16,14.25) 123.16,14.46 ; v1@123.012,70.398 cw(c123.16,70.25) 123.16,70.46 ; 124.54,19.757 cw(c124.54,17.77) 125.945,19.175 ; 124.54,20.011 cw(c124.54,18.637) 125.511,19.609 ; 124.54,75.757 cw(c124.54,73.77) 125.945,75.175 ; 124.54,76.011 cw(c124.54,74.637) 125.511,75.609 ; 124.992,16.902 cw(c124.44,16.35) 125.22,16.35 cw(c126,16.35) 125.448,16.902 ; 124.992,72.902 cw(c124.44,72.35) 125.22,72.35 cw(c126,72.35) 125.448,72.902 ; 125.163,20.38 ccw(c126.184,20.38) 125.462,19.658 ; 125.163,76.38 ccw(c126.184,76.38) 125.462,75.658 ; 125.656,19.464 cw(c124.422,18.23) 126.167,18.23 ; 125.656,75.464 cw(c124.422,74.23) 126.167,74.23 ; 126.089,19.031 cw(c125.289,18.23) 126.421,18.23 ; 126.089,75.031 cw(c125.289,74.23) 126.421,74.23 ; 126.262,16.902 cw(c125.71,16.35) 126.49,16.35 cw(c127.27,16.35) 126.718,16.902 ; 126.262,72.902 cw(c125.71,72.35) 126.49,72.35 cw(c127.27,72.35) 126.718,72.902
  other v1: 9.02,6.42 21.02,6.42 33.02,6.42 45.02,6.42 57.02,6.42 69.02,6.42 81.02,6.42 93.02,6.42 105.02,6.42 117.02,6.42 15.7,6.71 27.7,6.71 39.7,6.71 51.7,6.71 63.7,6.71 75.7,6.71 87.7,6.71 99.7,6.71 111.7,6.71 123.7,6.71 17.93,11.48 29.93,11.48 41.93,11.48 53.93,11.48 65.93,11.48 77.93,11.48 89.93,11.48 101.93,11.48 113.93,11.48 125.93,11.48 14.98,11.55 26.98,11.55 38.98,11.55 50.98,11.55 62.98,11.55 74.98,11.55 86.98,11.55 98.98,11.55 110.98,11.55 122.98,11.55 10.1,12.2 22.1,12.2 34.1,12.2 46.1,12.2 58.1,12.2 70.1,12.2 82.1,12.2 94.1,12.2 106.1,12.2 118.1,12.2 14.96,14.45 26.96,14.45 38.96,14.45 50.96,14.45 62.96,14.45 74.96,14.45 86.96,14.45 98.96,14.45 110.96,14.45 122.96,14.45 11.64,16.35 23.64,16.35 35.64,16.35 47.64,16.35 59.64,16.35 71.64,16.35 83.64,16.35 95.64,16.35 107.64,16.35 119.64,16.35 16.36,39.65 28.36,39.65 40.36,39.65 52.36,39.65 64.36,39.65 76.36,39.65 88.36,39.65 100.36,39.65 112.36,39.65 124.36,39.65 13.04,41.55 25.04,41.55 37.04,41.55 49.04,41.55 61.04,41.55 73.04,41.55 85.04,41.55 97.04,41.55 109.04,41.55 121.04,41.55 17.9,43.8 29.9,43.8 41.9,43.8 53.9,43.8 65.9,43.8 77.9,43.8 89.9,43.8 101.9,43.8 113.9,43.8 125.9,43.8 13.02,44.45 25.02,44.45 37.02,44.45 49.02,44.45 61.02,44.45 73.02,44.45 85.02,44.45 97.02,44.45 109.02,44.45 121.02,44.45 10.07,44.52 22.07,44.52 34.07,44.52 46.07,44.52 58.07,44.52 70.07,44.52 82.07,44.52 94.07,44.52 106.07,44.52 118.07,44.52 12.3,49.29 24.3,49.29 36.3,49.29 48.3,49.29 60.3,49.29 72.3,49.29 84.3,49.29 96.3,49.29 108.3,49.29 120.3,49.29 18.98,49.58 30.98,49.58 42.98,49.58 54.98,49.58 66.98,49.58 78.98,49.58 90.98,49.58 102.98,49.58 114.98,49.58 126.98,49.58 9.02,62.42 21.02,62.42 33.02,62.42 45.02,62.42 57.02,62.42 69.02,62.42 81.02,62.42 93.02,62.42 105.02,62.42 117.02,62.42 15.7,62.71 27.7,62.71 39.7,62.71 51.7,62.71 63.7,62.71 75.7,62.71 87.7,62.71 99.7,62.71 111.7,62.71 123.7,62.71 17.93,67.48 29.93,67.48 41.93,67.48 53.93,67.48 65.93,67.48 77.93,67.48 89.93,67.48 101.93,67.48 113.93,67.48 125.93,67.48 14.98,67.55 26.98,67.55 38.98,67.55 50.98,67.55 62.98,67.55 74.98,67.55 86.98,67.55 98.98,67.55 110.98,67.55 122.98,67.55 10.1,68.2 22.1,68.2 34.1,68.2 46.1,68.2 58.1,68.2 70.1,68.2 82.1,68.2 94.1,68.2 106.1,68.2 118.1,68.2 14.96,70.45 26.96,70.45 38.96,70.45 50.96,70.45 62.96,70.45 74.96,70.45 86.96,70.45 98.96,70.45 110.96,70.45 122.96,70.45 11.64,72.35 23.64,72.35 35.64,72.35 47.64,72.35 59.64,72.35 71.64,72.35 83.64,72.35 95.64,72.35 107.64,72.35 119.64,72.35 16.36,95.65 28.36,95.65 40.36,95.65 52.36,95.65 64.36,95.65 76.36,95.65 88.36,95.65 100.36,95.65 112.36,95.65 124.36,95.65 13.04,97.55 25.04,97.55 37.04,97.55 49.04,97.55 61.04,97.55 73.04,97.55 85.04,97.55 97.04,97.55 109.04,97.55 121.04,97.55 17.9,99.8 29.9,99.8 41.9,99.8 53.9,99.8 65.9,99.8 77.9,99.8 89.9,99.8 101.9,99.8 113.9,99.8 125.9,99.8 13.02,100.45 25.02,100.45 37.02,100.45 49.02,100.45 61.02,100.45 73.02,100.45 85.02,100.45 97.02,100.45 109.02,100.45 121.02,100.45 10.07,100.52 22.07,100.52 34.07,100.52 46.07,100.52 58.07,100.52 70.07,100.52 82.07,100.52 94.07,100.52 106.07,100.52 118.07,100.52 12.3,105.29 24.3,105.29 36.3,105.29 48.3,105.29 60.3,105.29 72.3,105.29 84.3,105.29 96.3,105.29 108.3,105.29 120.3,105.29 18.98,105.58 30.98,105.58 42.98,105.58 54.98,105.58 66.98,105.58 78.98,105.58 90.98,105.58 102.98,105.58 114.98,105.58 126.98,105.58

## Polygon pours and split planes (outlines as drawn)
no net on BottomLayer "TopLayer-No Net" (solid, remove dead copper): 20,75 8,75 8,61.95 19.98,61.95 20,61.93
no net on BottomLayer "TopLayer-No Net" (solid, remove dead copper): 32,75 20,75 20,61.95 31.98,61.95 32,61.93
no net on BottomLayer "TopLayer-No Net" (solid, remove dead copper): 44,75 32,75 32,61.95 43.98,61.95 44,61.93
no net on BottomLayer "TopLayer-No Net" (solid, remove dead copper): 56,75 44,75 44,61.95 55.98,61.95 56,61.93
no net on BottomLayer "TopLayer-No Net" (solid, remove dead copper): 68,75 56,75 56,61.95 67.98,61.95 68,61.93
no net on BottomLayer "TopLayer-No Net" (solid, remove dead copper): 80,75 68,75 68,61.95 79.98,61.95 80,61.93
no net on BottomLayer "TopLayer-No Net" (solid, remove dead copper): 92,75 80,75 80,61.95 91.98,61.95 92,61.93
no net on BottomLayer "TopLayer-No Net" (solid, remove dead copper): 104,75 92,75 92,61.95 103.98,61.95 104,61.93
no net on BottomLayer "TopLayer-No Net" (solid, remove dead copper): 116,75 104,75 104,61.95 115.98,61.95 116,61.93
no net on BottomLayer "TopLayer-No Net" (solid, remove dead copper): 128,75 116,75 116,61.95 127.98,61.95 128,61.93
no net on BottomLayer "TopLayer-No Net" (solid, remove dead copper): 116,93 128,93 128,106.05 116.02,106.05 116,106.07
no net on BottomLayer "TopLayer-No Net" (solid, remove dead copper): 104,93 116,93 116,106.05 104.02,106.05 104,106.07
no net on BottomLayer "TopLayer-No Net" (solid, remove dead copper): 92,93 104,93 104,106.05 92.02,106.05 92,106.07
no net on BottomLayer "TopLayer-No Net" (solid, remove dead copper): 80,93 92,93 92,106.05 80.02,106.05 80,106.07
no net on BottomLayer "TopLayer-No Net" (solid, remove dead copper): 68,93 80,93 80,106.05 68.02,106.05 68,106.07
no net on BottomLayer "TopLayer-No Net" (solid, remove dead copper): 56,93 68,93 68,106.05 56.02,106.05 56,106.07
no net on BottomLayer "TopLayer-No Net" (solid, remove dead copper): 44,93 56,93 56,106.05 44.02,106.05 44,106.07
no net on BottomLayer "TopLayer-No Net" (solid, remove dead copper): 32,93 44,93 44,106.05 32.02,106.05 32,106.07
no net on BottomLayer "TopLayer-No Net" (solid, remove dead copper): 20,93 32,93 32,106.05 20.02,106.05 20,106.07
no net on BottomLayer "TopLayer-No Net" (solid, remove dead copper): 8,93 20,93 20,106.05 8.02,106.05 8,106.07
no net on BottomLayer "TopLayer-No Net" (solid, remove dead copper): 116,37 128,37 128,50.05 116.02,50.05 116,50.07
no net on BottomLayer "TopLayer-No Net" (solid, remove dead copper): 104,37 116,37 116,50.05 104.02,50.05 104,50.07
no net on BottomLayer "TopLayer-No Net" (solid, remove dead copper): 92,37 104,37 104,50.05 92.02,50.05 92,50.07
no net on BottomLayer "TopLayer-No Net" (solid, remove dead copper): 80,37 92,37 92,50.05 80.02,50.05 80,50.07
no net on BottomLayer "TopLayer-No Net" (solid, remove dead copper): 68,37 80,37 80,50.05 68.02,50.05 68,50.07
no net on BottomLayer "TopLayer-No Net" (solid, remove dead copper): 56,37 68,37 68,50.05 56.02,50.05 56,50.07
no net on BottomLayer "TopLayer-No Net" (solid, remove dead copper): 44,37 56,37 56,50.05 44.02,50.05 44,50.07
no net on BottomLayer "TopLayer-No Net" (solid, remove dead copper): 32,37 44,37 44,50.05 32.02,50.05 32,50.07
no net on BottomLayer "TopLayer-No Net" (solid, remove dead copper): 20,37 32,37 32,50.05 20.02,50.05 20,50.07
no net on BottomLayer "TopLayer-No Net" (solid, remove dead copper): 8,37 20,37 20,50.05 8.02,50.05 8,50.07
no net on BottomLayer "TopLayer-No Net" (solid, remove dead copper): 128,19 116,19 116,5.95 127.98,5.95 128,5.93
no net on BottomLayer "TopLayer-No Net" (solid, remove dead copper): 116,19 104,19 104,5.95 115.98,5.95 116,5.93
no net on BottomLayer "TopLayer-No Net" (solid, remove dead copper): 104,19 92,19 92,5.95 103.98,5.95 104,5.93
no net on BottomLayer "TopLayer-No Net" (solid, remove dead copper): 92,19 80,19 80,5.95 91.98,5.95 92,5.93